# Altium PCB ROS_CAR.PcbDoc (part 11 of 13)
Units mil, origin at the board's own origin, x right, y up, seen from the top; angles counter-clockwise.
Board outline 3937.01 x 3937.01 mil, 2 copper layers (Top Layer, Bottom Layer); 201 components, 155 nets, 998 pads, 0 vias.
Unrouted connection lines stored in the file: 3.
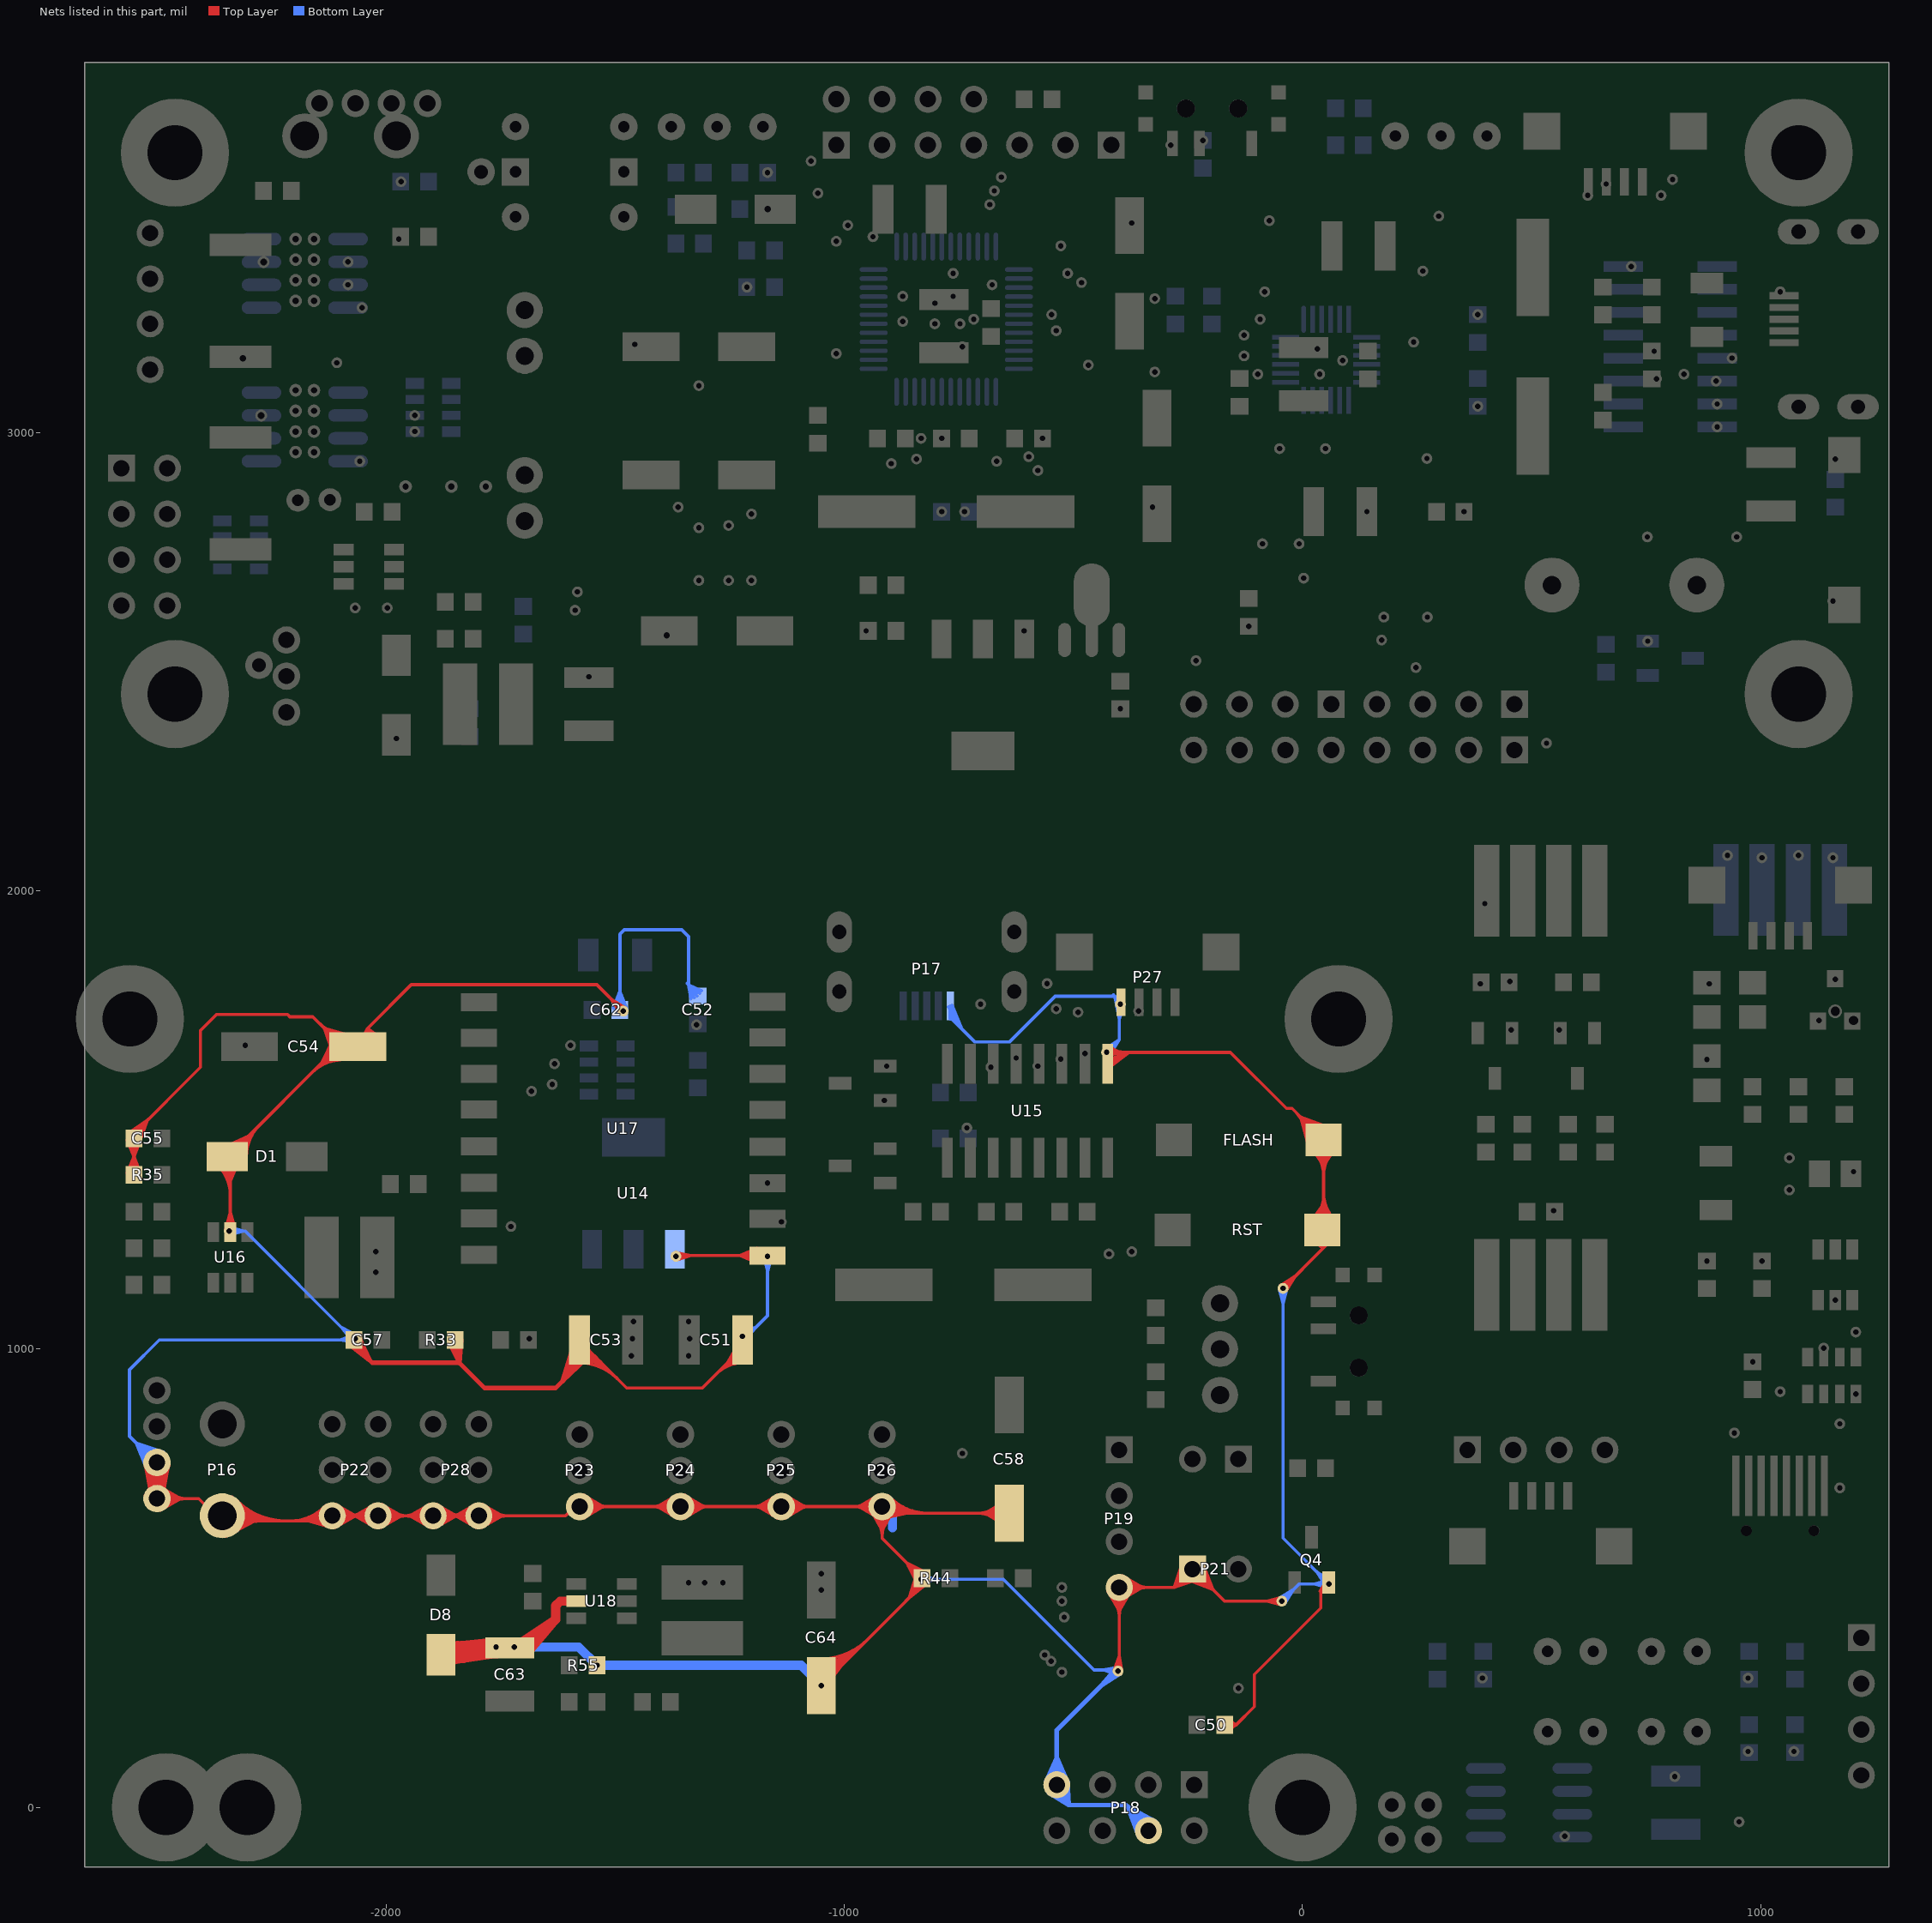
[diagram p11: the nets of this part, all layers, seen from the top]

## Nets (pads, with @x,y where several pads share a name; then routed paths per layer and width w, separated by ;. In a path a pad name is that pad's centre, name@x,y a point inside that pad or via, vN(x,y) a via of type N, cw(c..) or ccw(c..) an arc to the next point about the centre after c; other vN are vias at no path point) (continued)
SGND: C50.2 C51.1 C52.2 C53.2 C54.2 C55.1 C57.2 C58.2 C62.2 C63.2 C64.2 D1.1 D8.1 FLASH.1 P16.2 P17.1 P18.4 P18.6 P19.4 P21.1 P22.1 P22.2 P23.1 P24.1 P25.1 P26.1 P27.4 P28.1 P28.2 pad.0@-2500,673.78 pad.0@-2500,752.52 pad.1@57.5,487.5 pad.1@-42.5,1132.5 pad.1@-45,450 pad.1@-397.5,1752.5 pad.1@-402.5,297.5 pad.1@-427.5,1647.5 pad.1@-832.5,497.5 pad.1@-1050,265.67 pad.1@-1167.5,1202.5 pad.1@-1222.23,1027.77 pad.1@-1367.5,1202.5 pad.1@-1482.5,1737.5 pad.1@-1539.68,310 pad.1@-1720,350 pad.1@-1760,350 pad.1@-2067.5,1022.5 pad.1@-2342.5,1257.5 Q4.2 R33.2 R35.2 R44.2 R55.2 RST.2 U14.1 U15.1 U16.2 U17.9 U18.2 | length 60642.4
  Top Layer w7: R35.2@-2564.86,1383.77 -2550.32,1420.29 ; C55.1@-2564.86,1456.23 -2550.32,1419.71 ; R35.2@-2560.79,1391.45 ccw(c-2586.06,1416.73) -2550.32,1416.73 ccw(c-2514.57,1416.73) R35.2@-2539.84,1391.45 ; C55.1@-2560.79,1448.55 cw(c-2586.06,1423.27) -2550.32,1423.27 cw(c-2514.57,1423.27) C55.1@-2539.84,1448.55 ; C55.1@-2560.51,1471.73 -2520.99,1499.01 ; R35.2@-2558.08,1381.76 -2550.32,1420.29 ; C55.1@-2558.08,1458.24 -2550.32,1419.71 ; C55.1@-2556.09,1466.24 -2520.99,1499.01 ; R35.2@-2555.84,1386.5 ccw(c-2569.16,1399.83) -2550.32,1399.83 ccw(c-2531.47,1399.83) R35.2@-2544.79,1386.5 ; C55.1@-2555.84,1453.5 cw(c-2569.16,1440.17) -2550.32,1440.17 cw(c-2531.47,1440.17) C55.1@-2544.79,1453.5 ; R35.2@-2550.32,1380 -2550.32,1469.68 -2405,1615 -2405,1695 -2370,1730 -2215,1730 -2210,1725 -2160,1725 -2100,1665 D1.1@-2345,1420 ; R35.2@-2550.32,1380.98 -2550.32,1420.29 ; C55.1@-2550.32,1459.02 -2550.32,1419.71 ; C55.1@-2550.32,1460.98 -2520.99,1499.01 ; C55.1@-2550.32,1475.79 ccw(c-2550.32,1490.53) -2539.89,1480.11 ; C55.1@-2543.77,1456.73 -2520.99,1499.01 ; R35.2@-2542.55,1381.76 -2550.32,1420.29 ; C55.1@-2542.55,1458.24 -2550.32,1419.71 ; C55.1@-2542.51,1460.98 cw(c-2502.65,1460.98) -2530.84,1489.16 ; C55.1@-2537.34,1453.86 -2520.99,1499.01 ; R35.2@-2535.77,1383.77 -2550.32,1420.29 ; C55.1@-2535.77,1456.23 -2550.32,1419.71 ; C55.1@-2535.51,1460.98 cw(c-2478.75,1460.98) -2518.89,1501.11 ; pad.0@-2526.47,751.36 pad.0@-2510.88,697.92 ; pad.0@-2526.47,753.83 pad.0@-2516.02,697.17 ; pad.0@-2526.28,749.09 pad.0@-2506.4,699.25 ; pad.0@-2525.92,747.03 pad.0@-2502.59,700.83 ; pad.0@-2525.59,680.66 pad.0@-2500,724.78 ; pad.0@-2525.59,745.63 pad.0@-2500,701.52 ; pad.0@-2525.24,744.46 pad.0@-2497.41,700.83 ; pad.0@-2524.71,742.96 pad.0@-2493.6,699.25 ; pad.0@-2524.01,741.31 pad.0@-2489.12,697.92 ; pad.0@-2523.08,739.5 pad.0@-2483.98,697.17 ; pad.0@-2519.46,751.29 pad.0@-2506.4,699.25 ; pad.0@-2519.5,752.92 pad.0@-2510.88,697.92 ; pad.0@-2519.38,754.69 pad.0@-2516.02,697.17 ; pad.0@-2519.31,749.81 pad.0@-2502.59,700.83 ; pad.0@-2519.14,677.51 pad.0@-2500,724.78 ; pad.0@-2519.14,748.79 pad.0@-2500,701.52 ; pad.0@-2518.94,747.89 pad.0@-2497.41,700.83 ; pad.0@-2518.74,692.52 ccw(c-2563.98,737.76) -2500,737.76 ccw(c-2436.02,737.76) -2481.26,692.52 ccw(c-2436.02,737.76) -2436.02,673.78 ccw(c-2436.02,609.8) pad.0@-2481.26,655.04 ; pad.0@-2518.74,733.78 cw(c-2563.98,688.54) -2500,688.54 cw(c-2436.02,688.54) pad.0@-2481.26,733.78 ; pad.0@-2518.62,746.71 pad.0@-2493.6,699.25 ; pad.0@-2518.16,745.42 pad.0@-2489.12,697.92 ; pad.0@-2517.54,744.01 pad.0@-2483.98,697.17 ; pad.0@-2513.79,687.57 ccw(c-2547.08,720.86) -2500,720.86 ccw(c-2452.92,720.86) -2486.21,687.57 ccw(c-2452.92,720.86) -2452.92,673.78 ccw(c-2452.92,626.7) pad.0@-2486.21,659.99 ; pad.0@-2513.79,738.73 cw(c-2547.08,705.44) -2500,705.44 cw(c-2452.92,705.44) pad.0@-2486.21,738.73 ; pad.0@-2512.47,751.63 pad.0@-2502.59,700.83 ; pad.0@-2512.5,752.56 pad.0@-2506.4,699.25 ; pad.0@-2512.46,753.57 pad.0@-2510.88,697.92 ; pad.0@-2512.41,675.31 pad.0@-2500,724.78 ; pad.0@-2512.41,750.99 pad.0@-2500,701.52 ; pad.0@-2512.32,750.39 pad.0@-2497.41,700.83 ; pad.0@-2512.31,754.67 pad.0@-2516.02,697.17 ; pad.0@-2512.15,749.59 pad.0@-2493.6,699.25 ; pad.0@-2511.91,748.72 pad.0@-2489.12,697.92 ; pad.0@-2511.56,747.76 pad.0@-2483.98,697.17 ; pad.0@-2508.84,682.62 ccw(c-2530.18,703.96) -2500,703.96 ccw(c-2469.82,703.96) -2491.16,682.62 ccw(c-2469.82,703.96) -2469.82,673.78 ccw(c-2469.82,643.6) pad.0@-2491.16,664.94 ; pad.0@-2508.84,743.68 cw(c-2530.18,722.34) -2500,722.34 cw(c-2469.82,722.34) pad.0@-2491.16,743.68 ; pad.0@-2505.49,674.08 pad.0@-2500,724.78 ; pad.0@-2505.47,751.95 pad.0@-2497.41,700.83 ; pad.0@-2505.49,752.22 pad.0@-2500,701.52 ; pad.0@-2505.5,752.5 pad.0@-2502.59,700.83 ; pad.0@-2505.49,752.9 pad.0@-2506.4,699.25 ; pad.0@-2505.42,751.58 pad.0@-2493.6,699.25 ; pad.0@-2505.44,753.33 pad.0@-2510.88,697.92 ; pad.0@-2505.33,751.18 pad.0@-2489.12,697.92 ; pad.0@-2505.35,753.79 pad.0@-2516.02,697.17 ; pad.0@-2505.2,750.74 pad.0@-2483.98,697.17 ; pad.0@-2499.7,668.29 -2449,673.78 ; pad.0@-2499.7,679.27 -2449,673.78 ; pad.0@-2498.47,661.37 -2449,673.78 ; pad.0@-2498.47,686.19 -2449,673.78 ; pad.0@-2496.27,654.64 -2449,673.78 ; pad.0@-2496.27,692.92 -2449,673.78 ; pad.0@-2494.8,750.74 pad.0@-2516.02,697.17 ; pad.0@-2494.67,751.18 pad.0@-2510.88,697.92 ; pad.0@-2494.65,753.79 pad.0@-2483.98,697.17 ; pad.0@-2494.58,751.58 pad.0@-2506.4,699.25 ; pad.0@-2494.56,753.33 pad.0@-2489.12,697.92 ; pad.0@-2494.51,674.08 pad.0@-2500,724.78 ; pad.0@-2494.53,751.95 pad.0@-2502.59,700.83 ; pad.0@-2494.51,752.22 pad.0@-2500,701.52 ; pad.0@-2494.51,752.9 pad.0@-2493.6,699.25 ; pad.0@-2494.5,752.5 pad.0@-2497.41,700.83 ; pad.0@-2493.12,648.19 -2449,673.78 ; pad.0@-2493.12,699.37 -2449,673.78 ; pad.0@-2488.44,747.76 pad.0@-2516.02,697.17 ; pad.0@-2488.09,748.72 pad.0@-2510.88,697.92 ; pad.0@-2487.85,749.59 pad.0@-2506.4,699.25 ; pad.0@-2487.68,750.39 pad.0@-2502.59,700.83 ; pad.0@-2487.69,754.67 pad.0@-2483.98,697.17 ; pad.0@-2487.59,675.31 pad.0@-2500,724.78 ; pad.0@-2487.59,750.99 pad.0@-2500,701.52 ; pad.0@-2487.53,751.63 pad.0@-2497.41,700.83 ; pad.0@-2487.54,753.57 pad.0@-2489.12,697.92 ; pad.0@-2487.5,752.56 pad.0@-2493.6,699.25 ; pad.0@-2482.46,744.01 pad.0@-2516.02,697.17 ; pad.0@-2481.84,745.42 pad.0@-2510.88,697.92 ; pad.0@-2481.38,746.71 pad.0@-2506.4,699.25 ; pad.0@-2481.06,747.89 pad.0@-2502.59,700.83 ; pad.0@-2480.86,677.51 pad.0@-2500,724.78 ; pad.0@-2480.86,748.79 pad.0@-2500,701.52 ; pad.0@-2480.69,749.81 pad.0@-2497.41,700.83 ; pad.0@-2480.62,754.69 pad.0@-2483.98,697.17 ; pad.0@-2480.54,751.29 pad.0@-2493.6,699.25 ; pad.0@-2480.5,752.92 pad.0@-2489.12,697.92 ; pad.0@-2476.92,739.5 pad.0@-2516.02,697.17 ; pad.0@-2475.99,741.31 pad.0@-2510.88,697.92 ; pad.0@-2475.29,742.96 pad.0@-2506.4,699.25 ; pad.0@-2474.76,744.46 pad.0@-2502.59,700.83 ; pad.0@-2474.41,680.66 pad.0@-2500,724.78 ; pad.0@-2474.41,745.63 pad.0@-2500,701.52 ; pad.0@-2474.08,747.03 pad.0@-2497.41,700.83 ; pad.0@-2473.72,749.09 pad.0@-2493.6,699.25 ; pad.0@-2473.53,751.36 pad.0@-2489.12,697.92 ; pad.0@-2473.53,753.83 pad.0@-2483.98,697.17 ; D1.1@-2372.52,1409.38 -2340,1366.97 ; D1.1@-2366.53,1413.36 -2340,1366.97 ; D1.1@-2366.41,1400.2 cw(c-2430.17,1336.44) -2340,1336.44 ; D1.1@-2361.46,1405.15 cw(c-2413.27,1353.34) -2340,1353.34 ; D1.1@-2360.16,1416.46 -2340,1366.97 ; P16.2@-2360,625 -2408.78,673.78 pad.0@-2500,673.78 pad.0@-2500,752.52 ; P16.2@-2358.11,618.68 -2286.46,625 ; P16.2@-2357.48,625 -2128.86,625 P22.2@-2117.48,636.38 ; P16.2@-2357.14,611.67 -2286.46,625 ; D1.1@-2356.51,1410.1 cw(c-2396.37,1370.24) -2340,1370.24 ; P16.2@-2355.47,604.73 -2286.46,625 ; D1.1@-2353.48,1418.68 -2340,1366.97 ; P16.2@-2353.09,597.91 -2286.46,625 ; P16.2@-2352.55,653.39 -2286.46,625 ; D1.1@-2351.56,1415.05 cw(c-2379.47,1387.14) -2340,1387.14 ; U16.2@-2350.72,1258.76 -2341.18,1293.61 ; U16.2@-2350.68,1258.96 -2339.7,1296.72 ; D1.1@-2350.61,1441.63 -2299.35,1465.65 ; P16.2@-2349.99,591.28 -2286.46,625 ; P16.2@-2349.91,643.95 ccw(c-2304.15,689.71) -2304.15,625 ; P16.2@-2349.44,659.74 -2286.46,625 ; U16.2@-2349.21,1265.25 -2340,1297.77 ; U16.2@-2348.38,1263.38 ccw(c-2368.6,1283.6) -2340,1283.6 ; D1.1@-2347.17,1435.34 -2299.35,1465.65 ; U16.2@-2346.57,1270.55 ccw(c-2362.44,1286.42) -2340,1286.42 ccw(c-2317.56,1286.42) U16.2@-2333.43,1270.55 ; P16.2@-2345.68,665.81 -2286.46,625 ; P16.2@-2344.96,648.9 ccw(c-2287.25,706.61) -2287.25,625 ; D1.1@-2343.01,1429.61 -2299.35,1465.65 ; P16.2@-2341.29,671.54 -2286.46,625 ; P16.2@-2340.01,653.85 ccw(c-2270.35,723.51) -2270.35,625 ; U16.2@-2340,1255.12 -2340,1415 D1.1@-2345,1420 ; U16.2@-2340,1263.98 -2340,1297.77 ; U16.2@-2340,1271.53 ccw(c-2328.47,1271.53) U16.2@-2336.62,1263.38 ; -2340,1368.38 cw(c-2294.99,1368.38) D1.1@-2326.82,1400.2 ; -2340,1385.28 cw(c-2311.89,1385.28) D1.1@-2331.77,1405.15 ; D1.1@-2339.63,1420.41 -2340,1366.97 ; D1.1@-2338.21,1424.48 -2299.35,1465.65 ; P16.2@-2336.28,676.88 -2286.46,625 ; P16.2@-2335.06,613.95 cw(c-2308.39,587.29) -2308.39,625 ; P16.2@-2335.06,658.8 ccw(c-2253.45,740.41) -2253.45,625 ; U16.2@-2334.21,1258.15 -2341.18,1293.61 ; U16.2@-2334.19,1257.79 -2339.7,1296.72 ; D1.1@-2332.83,1420 -2299.35,1465.65 ; D1.1@-2332.83,1448 ccw(c-2332.83,1486.21) -2305.81,1459.19 ; D1.1@-2332.62,1419.9 -2340,1366.97 ; U16.2@-2330.79,1265.25 -2340,1297.77 ; P16.2@-2330.11,609 cw(c-2291.49,570.39) -2291.49,625 ; P16.2@-2330.11,663.75 ccw(c-2236.55,757.31) -2236.55,625 ; D1.1@-2326.95,1416.22 -2299.35,1465.65 ; D1.1@-2325.84,1420 cw(c-2279.58,1420) -2312.29,1452.71 ; D1.1@-2325.68,1418.46 -2340,1366.97 ; P16.2@-2325.16,604.05 cw(c-2274.59,553.49) -2274.59,625 ; P16.2@-2325.16,668.7 ccw(c-2219.65,774.21) -2219.65,625 ; D1.1@-2320.61,1413.18 -2299.35,1465.65 ; D1.1@-2318.9,1416.07 -2340,1366.97 ; D1.1@-2318.84,1420 cw(c-2255.68,1420) -2300.34,1464.66 ; D1.1@-2313.9,1410.94 -2299.35,1465.65 ; D1.1@-2311.84,1420 cw(c-2231.78,1420) -2288.39,1476.61 ; D1.1@-2306.87,1409.54 -2299.35,1465.65 ; D1.1@-2304.84,1420 cw(c-2207.88,1420) -2276.44,1488.56 ; -2207.79,625 ccw(c-2207.79,726.68) P22.2@-2135.88,654.78 ; -2190.89,625 ccw(c-2190.89,709.78) P22.2@-2130.93,649.83 ; -2173.99,625 ccw(c-2173.99,692.88) P22.2@-2125.99,644.88 ; -2161.7,1603.3 cw(c-2092.4,1534) C54.2@-2092.4,1632 ; -2157.09,625 ccw(c-2157.09,675.98) P22.2@-2121.04,639.93 ; -2152.85,625 cw(c-2152.85,601.01) P22.2@-2135.88,617.97 ; -2149.75,1615.25 cw(c-2092.4,1557.9) C54.2@-2092.4,1639 ; -2144.63,1709.63 ccw(c-2092.4,1761.86) C54.2@-2092.4,1688 ; -2138.36,1703.36 cw(c-2181.71,1660) -2120.4,1660 cw(c-2157.57,1660) -2131.29,1633.71 ; -2137.8,1627.2 cw(c-2092.4,1581.8) C54.2@-2092.4,1646 ; -2132.68,1697.68 ccw(c-2092.4,1737.96) C54.2@-2092.4,1681 ; P22.2@-2128.88,659.78 -2170.57,625 ; -2126.41,1691.41 cw(c-2157.81,1660) C54.2@-2113.4,1660 ; -2125.85,1639.15 cw(c-2092.4,1605.7) C54.2@-2092.4,1653 ; P22.2@-2124.67,654 -2170.57,625 ; P22.2@-2121.29,647.79 -2170.57,625 ; C54.2@-2120.73,1685.73 ccw(c-2092.4,1714.06) C54.2@-2092.4,1674 ; P22.2@-2118.76,641.24 -2170.57,625 ; P22.2@-2118.28,610.36 -2170.57,625 ; P22.2@-2117.23,631.36 -2066.95,636.38 ; P22.2@-2117.23,641.4 -2066.95,636.38 ; P22.2@-2116.81,617.36 -2170.57,625 ; P22.2@-2116.66,631.42 -2170.57,625 ; P22.2@-2116.28,624.41 -2170.57,625 ; P22.2@-2116.05,624.44 -2066.95,636.38 ; P22.2@-2116.05,648.32 -2066.95,636.38 ; C54.2@-2115.92,1644.81 -2134.74,1699.74 ; P22.2@-2113.9,617.69 -2066.95,636.38 ; P22.2@-2113.9,655.07 -2066.95,636.38 ; C54.2@-2113.83,1678.01 -2140.66,1624.34 ; P22.2@-2110.78,611.23 -2066.95,636.38 ; P22.2@-2110.78,661.53 -2066.95,636.38 ; C54.2@-2109.3,1647.54 -2134.74,1699.74 ; C54.2@-2107.64,1674.44 -2140.66,1624.34 ; P22.2@-2104.03,622.92 cw(c-2071.54,590.44) -2071.54,636.38 cw(c-2071.54,682.31) P22.2@-2104.03,649.83 ; C54.2@-2103.14,1651.02 -2134.74,1699.74 ; C54.2@-2101.98,1670.21 -2140.66,1624.34 ; P22.2@-2099.08,617.97 cw(c-2054.64,573.54) -2054.64,636.38 cw(c-2054.64,699.21) P22.2@-2099.08,654.78 ; C54.2@-2097.49,1655.2 -2134.74,1699.74 ; C54.2@-2096.88,1665.37 -2140.66,1624.34 ; C54.2@-2088.58,1654.14 -2140.66,1624.34 ; C54.2@-2087.93,1665.38 -2134.74,1699.74 ; C54.2@-2085.45,1647.85 -2140.66,1624.34 ; C54.2@-2084.12,1671.28 -2134.74,1699.74 ; C54.2@-2083.07,1641.19 -2140.66,1624.34 ; C54.2@-2081.47,1634.22 -2140.66,1624.34 ; C54.2@-2081.04,1677.65 -2134.74,1699.74 ; C54.2@-2078.73,1684.43 -2134.74,1699.74 ; C54.2@-2059.11,1663.82 -2040,1700 ; C54.2@-2052.35,1660.99 -2040,1700 ; C54.2@-2048.73,1681.97 ccw(c-2062.98,1700) -2040,1700 ; C54.2@-2045.36,1659.43 -2040,1700 ; C54.2@-2040,1670 -2040,1700 ; -2040,1692.35 ccw(c-2028.52,1692.35) C54.2@-2029.53,1680.91 ; C54.2@-2038.32,1659.12 -2040,1700 ; P22.1@-2035.88,617.97 ccw(c-2080.32,573.54) -2080.32,636.38 ccw(c-2080.32,699.21) P22.1@-2035.88,654.78 ; C54.2@-2031.38,1660 -2040,1700 ; P22.1@-2030.93,622.92 ccw(c-2063.42,590.44) -2063.42,636.38 ccw(c-2063.42,682.31) P22.1@-2030.93,649.83 ; C54.2@-2028.91,1687.89 cw(c-2027.84,1700) -2040,1700 ; C54.2@-2024.69,1662.05 -2040,1700 ; P22.1@-2024.18,611.23 -2068.01,636.38 ; P22.1@-2024.18,661.53 -2068.01,636.38 ; P22.1@-2021.06,617.69 -2068.01,636.38 ; P22.1@-2021.06,655.07 -2068.01,636.38 ; P22.1@-2018.91,624.44 -2068.01,636.38 ; P22.1@-2018.91,648.32 -2068.01,636.38 ; C54.2@-2018.4,1665.25 -2040,1700 ; P22.1@-2017.73,631.36 -2068.01,636.38 ; P22.1@-2017.73,641.4 -2068.01,636.38 ; P22.1@-2017.23,631.36 -1966.95,636.38 ; P22.1@-2017.23,641.4 -1966.95,636.38 ; P22.1@-2016.05,624.44 -1966.95,636.38 ; P22.1@-2016.05,648.32 -1966.95,636.38 ; P22.1@-2013.9,617.69 -1966.95,636.38 ; P22.1@-2013.9,655.07 -1966.95,636.38 ; C54.2@-2012.68,1669.54 -2040,1700 ; P22.1@-2010.78,611.23 -1966.95,636.38 ; P22.1@-2010.78,661.53 -1966.95,636.38 ; C54.2@-2007.68,1674.91 -2040,1700 ; P22.1@-2004.03,622.92 cw(c-1971.54,590.44) -1971.54,636.38 cw(c-1971.54,682.31) P22.1@-2004.03,649.83 ; P22.1@-1999.08,617.97 cw(c-1954.64,573.54) -1954.64,636.38 cw(c-1954.64,699.21) P22.1@-1999.08,654.78 ; P28.2@-1915.88,617.97 ccw(c-1960.32,573.54) -1960.32,636.38 ccw(c-1960.32,699.21) P28.2@-1915.88,654.78 ; P28.2@-1910.93,622.92 ccw(c-1943.42,590.44) -1943.42,636.38 ccw(c-1943.42,682.31) P28.2@-1910.93,649.83 ; P28.2@-1904.18,611.23 -1948.01,636.38 ; P28.2@-1904.18,661.53 -1948.01,636.38 ; P28.2@-1901.06,617.69 -1948.01,636.38 ; P28.2@-1901.06,655.07 -1948.01,636.38 ; P28.2@-1898.91,624.44 -1948.01,636.38 ; P28.2@-1898.91,648.32 -1948.01,636.38 ; P28.2@-1897.73,631.36 -1948.01,636.38 ; P28.2@-1897.73,641.4 -1948.01,636.38 ; P28.2@-1897.23,631.36 -1846.95,636.38 ; P28.2@-1897.23,641.4 -1846.95,636.38 ; P28.2@-1896.05,624.44 -1846.95,636.38 ; P28.2@-1896.05,648.32 -1846.95,636.38 ; P28.2@-1893.9,617.69 -1846.95,636.38 ; P28.2@-1893.9,655.07 -1846.95,636.38 ; P28.2@-1890.78,611.23 -1846.95,636.38 ; P28.2@-1890.78,661.53 -1846.95,636.38 ; P28.2@-1884.03,622.92 cw(c-1851.54,590.44) -1851.54,636.38 cw(c-1851.54,682.31) P28.2@-1884.03,649.83 ; P28.2@-1879.08,617.97 cw(c-1834.64,573.54) -1834.64,636.38 cw(c-1834.64,699.21) P28.2@-1879.08,654.78 ; P28.1@-1815.88,617.97 ccw(c-1860.32,573.54) -1860.32,636.38 ccw(c-1860.32,699.21) P28.1@-1815.88,654.78 ; P28.1@-1810.93,622.92 ccw(c-1843.42,590.44) -1843.42,636.38 ccw(c-1843.42,682.31) P28.1@-1810.93,649.83 ; P28.1@-1804.18,611.23 -1848.01,636.38 ; P28.1@-1804.18,661.53 -1848.01,636.38 ; P28.1@-1801.06,617.69 -1848.01,636.38 ; P28.1@-1801.06,655.07 -1848.01,636.38 ; P28.1@-1798.91,624.44 -1848.01,636.38 ; P28.1@-1798.91,648.32 -1848.01,636.38 ; P28.1@-1797.73,631.36 -1848.01,636.38 ; P28.1@-1797.73,641.4 -1848.01,636.38 ; P28.1@-1797.23,631.36 -1746.95,636.38 ; P28.1@-1797.23,641.4 -1746.95,636.38 ; P28.1@-1796.05,624.44 -1746.95,636.38 ; P28.1@-1796.05,648.32 -1746.95,636.38 ; P28.1@-1793.9,617.69 -1746.95,636.38 ; P28.1@-1793.9,655.07 -1746.95,636.38 ; P28.1@-1790.78,611.23 -1746.95,636.38 ; P28.1@-1790.78,661.53 -1746.95,636.38 ; P28.1@-1784.03,622.92 cw(c-1751.54,590.44) -1751.54,636.38 cw(c-1751.54,682.31) P28.1@-1784.03,649.83 ; P28.1@-1779.08,617.97 cw(c-1734.64,573.54) -1734.64,636.38 cw(c-1734.64,699.21) P28.1@-1779.08,654.78 ; C53.2@-1578.85,984.01 -1541.11,981.11 ; C53.2@-1578.74,976.97 -1541.11,981.11 ; C53.2@-1578.07,969.96 cw(c-1578.07,853.8) -1495.93,935.93 ; C53.2@-1578.07,976.96 cw(c-1578.07,877.7) -1507.88,947.88 ; C53.2@-1578.07,983.96 cw(c-1578.07,901.6) -1519.83,959.83 ; C53.2@-1578.07,989.29 -1541.11,981.11 ; C53.2@-1578.07,990.96 cw(c-1578.07,925.5) -1531.78,971.78 ; C53.2@-1578.07,997.96 cw(c-1578.07,949.4) -1543.73,983.73 ; C53.2@-1578.07,1004.96 cw(c-1578.07,973.3) C53.2@-1555.68,995.68 ; P23.1@-1577.48,656.38 -1526.48,656.38 ; C53.2@-1577.29,969.97 -1541.11,981.11 ; P23.1@-1577.18,650.89 -1526.48,656.38 ; P23.1@-1577.18,661.87 -1526.48,656.38 ; C53.2@-1576.55,994.41 -1541.11,981.11 ; P23.1@-1575.95,643.97 -1526.48,656.38 ; P23.1@-1575.95,668.78 -1526.48,656.38 ; P23.1@-1573.75,637.24 -1526.48,656.38 ; P23.1@-1573.75,675.52 -1526.48,656.38 ; C53.2@-1573.48,1000.74 -1541.11,981.11 ; P23.1@-1570.6,630.79 -1526.48,656.38 ; P23.1@-1570.6,681.97 -1526.48,656.38 ; C53.2@-1569.21,1006.48 -1541.11,981.11 ; P23.1@-1568.64,647.54 cw(c-1547.3,626.2) -1547.3,656.38 cw(c-1547.3,686.56) P23.1@-1568.64,665.22 ; C53.2@-1565,1005 -1475,915 -1310,915 C51.1@-1220,1005 ; P23.1@-1563.69,642.59 cw(c-1530.4,609.3) -1530.4,656.38 cw(c-1530.4,703.46) P23.1@-1563.69,670.17 ; P23.1@-1558.74,637.64 cw(c-1513.5,592.4) -1513.5,656.38 cw(c-1513.5,720.35) P23.1@-1558.74,675.12 ; pad.1@-1490.81,1737.5 ccw(c-1510.88,1737.5) -1496.69,1751.69 ccw(c-1482.5,1765.88) pad.1@-1482.5,1745.81 ; pad.1@-1488.99,1732.31 -1509.16,1764.16 pad.1@-1477.31,1743.99 ; pad.1@-1482.5,1737.5 -1540,1795 -1945,1795 -2040,1700 ; P24.1@-1376.22,637.64 ccw(c-1421.46,592.4) -1421.46,656.38 ccw(c-1421.46,720.35) P24.1@-1376.22,675.12 ; pad.1@-1374.02,1204.02 U17.9@-1167.56,1204.02 ; P24.1@-1371.27,642.59 ccw(c-1404.56,609.3) -1404.56,656.38 ccw(c-1404.56,703.46) P24.1@-1371.27,670.17 ; pad.1@-1367.5,1202.5 -1334.63,1204.02 ; pad.1@-1366.83,1210.78 -1334.63,1204.02 ; P24.1@-1366.32,647.54 ccw(c-1387.66,626.2) -1387.66,656.38 ccw(c-1387.66,686.56) P24.1@-1366.32,665.22 ; pad.1@-1366.07,1194.31 -1334.63,1204.02 ; P24.1@-1364.37,630.79 -1408.48,656.38 ; P24.1@-1364.37,681.97 -1408.48,656.38 ; pad.1@-1361.62,1196.62 cw(c-1343.78,1178.78) -1343.78,1204.02 ; pad.1@-1361.62,1208.38 ccw(c-1351.1,1218.9) -1351.1,1204.02 ; P24.1@-1361.21,637.24 -1408.48,656.38 ; P24.1@-1361.21,675.52 -1408.48,656.38 ; P24.1@-1359.01,643.97 -1408.48,656.38 ; P24.1@-1359.01,668.78 -1408.48,656.38 ; P24.1@-1357.78,650.89 -1408.48,656.38 ; P24.1@-1357.78,661.87 -1408.48,656.38 ; P24.1@-1357.18,650.89 -1306.48,656.38 ; P24.1@-1357.18,661.87 -1306.48,656.38 ; P24.1@-1355.95,643.97 -1306.48,656.38 ; P24.1@-1355.95,668.78 -1306.48,656.38 ; P24.1@-1353.75,637.24 -1306.48,656.38 ; P24.1@-1353.75,675.52 -1306.48,656.38 ; P24.1@-1350.6,630.79 -1306.48,656.38 ; P24.1@-1350.6,681.97 -1306.48,656.38 ; P24.1@-1348.64,647.54 cw(c-1327.3,626.2) -1327.3,656.38 cw(c-1327.3,686.56) P24.1@-1348.64,665.22 ; P24.1@-1343.69,642.59 cw(c-1310.4,609.3) -1310.4,656.38 cw(c-1310.4,703.46) P24.1@-1343.69,670.17 ; P24.1@-1338.74,637.64 cw(c-1293.5,592.4) -1293.5,656.38 cw(c-1293.5,720.35) P24.1@-1338.74,675.12 ; -1278.46,946.54 cw(c-1221.93,890.01) C51.1@-1221.93,969.96 ; -1266.51,958.49 cw(c-1221.93,913.91) C51.1@-1221.93,976.96 ; -1254.56,970.44 cw(c-1221.93,937.81) C51.1@-1221.93,983.96 ; -1245.19,979.81 ccw(c-1254.67,989.29) C51.1@-1241.26,989.29 ; C51.1@-1235.57,1002.99 -1254.38,970.62 ; C51.1@-1229.76,998.82 -1254.38,970.62 ; C51.1@-1224.91,993.71 -1254.38,970.62 ; C51.1@-1221.93,989.29 -1254.38,970.62 ; C51.1@-1219.61,984.49 -1254.38,970.62 ; C51.1@-1217.62,977.73 -1254.38,970.62 ; C51.1@-1216.94,970.61 -1254.38,970.62 ; U17.9@-1198.69,1192.57 ccw(c-1226.32,1164.94) -1226.32,1204.02 ccw(c-1226.32,1243.09) U17.9@-1198.69,1215.46 ; U17.9@-1193.74,1197.52 ccw(c-1209.42,1181.84) -1209.42,1204.02 ccw(c-1209.42,1226.19) U17.9@-1193.74,1210.51 ; U17.9@-1191.22,1204.02 cw(c-1191.22,1178.78) U17.9@-1173.38,1196.62 ; U17.9@-1190.46,1188.15 -1227.93,1204.02 ; U17.9@-1190.46,1219.88 -1227.93,1204.02 ; U17.9@-1188.28,1194.89 -1227.93,1204.02 ; U17.9@-1188.28,1213.14 -1227.93,1204.02 ; U17.9@-1187.24,1204.02 -1227.93,1204.02 ; U17.9@-1183.9,1204.02 ccw(c-1183.9,1218.9) U17.9@-1173.38,1208.38 ; U17.9@-1168.93,1194.31 U17.9@-1200.4,1204.02 ; U17.9@-1168.17,1210.78 U17.9@-1200.4,1204.02 ; pad.1@-1167.5,1202.5 U17.9@-1200.4,1204.02 ; P25.1@-1156.22,637.64 ccw(c-1201.46,592.4) -1201.46,656.38 ccw(c-1201.46,720.35) P25.1@-1156.22,675.12 ; P25.1@-1151.27,642.59 ccw(c-1184.56,609.3) -1184.56,656.38 ccw(c-1184.56,703.46) P25.1@-1151.27,670.17 ; P25.1@-1146.32,647.54 ccw(c-1167.66,626.2) -1167.66,656.38 ccw(c-1167.66,686.56) P25.1@-1146.32,665.22 ; P25.1@-1144.37,630.79 -1188.48,656.38 ; P25.1@-1144.37,681.97 -1188.48,656.38 ; P25.1@-1141.21,637.24 -1188.48,656.38 ; P25.1@-1141.21,675.52 -1188.48,656.38 ; P25.1@-1139.01,643.97 -1188.48,656.38 ; P25.1@-1139.01,668.78 -1188.48,656.38 ; P25.1@-1137.78,650.89 -1188.48,656.38 ; P25.1@-1137.78,661.87 -1188.48,656.38 ; P25.1@-1137.18,650.89 -1086.48,656.38 ; P25.1@-1137.18,661.87 -1086.48,656.38 ; P25.1@-1135.95,643.97 -1086.48,656.38 ; P25.1@-1135.95,668.78 -1086.48,656.38 ; P25.1@-1133.75,637.24 -1086.48,656.38 ; P25.1@-1133.75,675.52 -1086.48,656.38 ; P25.1@-1130.6,630.79 -1086.48,656.38 ; P25.1@-1130.6,681.97 -1086.48,656.38 ; P25.1@-1128.64,647.54 cw(c-1107.3,626.2) -1107.3,656.38 cw(c-1107.3,686.56) P25.1@-1128.64,665.22 ; P25.1@-1123.69,642.59 cw(c-1090.4,609.3) -1090.4,656.38 cw(c-1090.4,703.46) P25.1@-1123.69,670.17 ; P25.1@-1118.74,637.64 cw(c-1073.5,592.4) -1073.5,656.38 cw(c-1073.5,720.35) P25.1@-1118.74,675.12 ; C64.2@-1055.19,272.16 -1023.34,292.33 C64.2@-1043.51,260.48 ; C64.2@-1052.59,309.94 -1003.65,312.01 ; C64.2@-1052.37,317.04 -1003.65,312.01 ; C64.2@-1051.78,302.95 -1003.65,312.01 ; C64.2@-1051.1,324.16 -1003.65,312.01 ; C64.2@-1050,265.67 R44.2@-830.32,485.35 ; C64.2@-1050,273.98 ccw(c-1050,294.04) -1035.81,279.86 ccw(c-1021.62,265.67) C64.2@-1041.69,265.67 ; C64.2@-1050,289.18 ccw(c-1050,345.93) -1009.87,305.8 ; C64.2@-1050,303.18 ccw(c-1050,393.73) -985.97,329.7 ; C64.2@-1050,310.18 ccw(c-1050,417.63) -974.02,341.65 ; C64.2@-1050,317.18 ccw(c-1050,441.53) -962.07,353.6 ; C64.2@-1050,324.18 ccw(c-1050,465.43) -950.12,365.55 ; C64.2@-1047.27,289.74 -1003.65,312.01 ; C64.2@-1043.63,283.72 -1003.65,312.01 ; C64.2@-1039.11,278.23 -1003.65,312.01 ; C64.2@-1033.75,273.38 -1003.65,312.01 ; -997.92,317.75 cw(c-1050,369.83) -1050,296.18 -1003.65,312.01 ; P26.1@-943.07,649.49 -917.48,605.38 ; P26.1@-936.62,652.65 -917.48,605.38 ; P26.1@-936.22,675.12 cw(c-981.46,720.35) -981.46,656.38 cw(c-981.46,592.4) -936.22,637.64 cw(c-981.46,592.4) -917.48,592.4 cw(c-853.5,592.4) -898.74,637.64 cw(c-888.48,627.38) -888.48,641.89 ; P26.1@-931.27,670.17 cw(c-964.56,703.46) -964.56,656.38 cw(c-964.56,609.3) -931.27,642.59 cw(c-964.56,609.3) -917.48,609.3 cw(c-870.4,609.3) P26.1@-903.69,642.59 ; P26.1@-929.89,654.85 -917.48,605.38 ; P26.1@-926.32,665.22 cw(c-947.66,686.56) -947.66,656.38 cw(c-947.66,626.2) -926.32,647.54 cw(c-947.66,626.2) -917.48,626.2 cw(c-887.3,626.2) P26.1@-908.64,647.54 ; P26.1@-924.37,630.79 -968.48,656.38 ; P26.1@-924.37,681.97 -968.48,656.38 ; P26.1@-922.97,656.08 -917.48,605.38 ; P26.1@-921.21,637.24 -968.48,656.38 ; P26.1@-921.21,675.52 -968.48,656.38 ; P26.1@-919.33,644.02 -862.95,641.89 ; P26.1@-919.16,636.95 -862.95,641.89 ; P26.1@-919.01,643.97 -968.48,656.38 ; P26.1@-919.01,668.78 -968.48,656.38 ; P26.1@-918.63,651 -862.95,641.89 ; P26.1@-918.54,655.32 ccw(c-886.12,687.73) -886.12,641.89 ; P26.1@-918.08,629.88 -862.95,641.89 ; P26.1@-917.78,650.89 -968.48,656.38 ; P26.1@-917.78,661.87 -968.48,656.38 ; P26.1@-917.48,650 -909.37,641.89 C58.2@-640,641.89 ; P26.1@-915.81,661.62 -862.95,641.89 ; P26.1@-913.59,660.27 ccw(c-869.22,704.63) -869.22,641.89 ; P26.1@-912.95,668.03 -862.95,641.89 ; P26.1@-911.99,656.08 -917.48,605.38 ; P26.1@-909.29,674.08 -862.95,641.89 ; P26.1@-908.64,665.22 ccw(c-852.33,721.53) -852.33,641.89 ; P26.1@-905.07,654.85 -917.48,605.38 ; P26.1@-904.85,679.68 -862.95,641.89 ; P26.1@-903.69,670.17 ccw(c-835.43,738.43) -835.43,641.89 ; P26.1@-898.74,675.12 ccw(c-818.53,755.33) -818.53,641.89 ; P26.1@-898.34,652.65 -917.48,605.38 ; P26.1@-891.89,649.49 -917.48,605.38 ; -865.25,450.42 ccw(c-913.85,499.02) R44.2@-845.12,499.02 ; -857.27,526.96 ccw(c-830.32,553.91) R44.2@-830.32,515.79 ; -856.82,458.85 ccw(c-895.47,497.5) -840.81,497.5 ccw(c-872.19,497.5) -850,519.69 ; -854.9,524.58 cw(c-878.49,500.98) R44.2@-845.12,500.98 ; -853.3,462.37 ccw(c-889.95,499.02) R44.2@-838.12,499.02 ; R44.2@-845.32,515.01 ccw(c-830.32,530.02) R44.2@-830.32,508.79 ; -844.87,470.8 ccw(c-871.57,497.5) R44.2@-833.81,497.5 ; R44.2@-843.69,505.38 -858.37,457.3 ; R44.2@-842.2,492.15 -863.47,533.16 ; -841.35,474.32 ccw(c-866.05,499.02) R44.2@-831.12,499.02 ; R44.2@-840.04,501 -853.5,462.17 ; R44.2@-840,501.08 -851.26,467.87 ; R44.2@-839.79,501.49 -853.36,468.03 ; R44.2@-839.67,501.7 -855.66,466.15 ; R44.2@-839.53,493.07 -857.15,528.82 ; R44.2@-839.42,492.9 -856.69,526.38 ; R44.2@-839.46,492.95 -856.13,526.03 ; R44.2@-839.24,492.63 -857.43,524.89 ; R44.2@-839.08,492.42 -859.78,526.03 ; R44.2@-838.69,508.38 ccw(c-832.5,514.57) R44.2@-832.5,505.81 ; R44.2@-837.11,502.86 -858.37,457.3 ; R44.2@-836.21,495.86 -863.47,533.16 ; R44.2@-834.99,489.57 R44.2@-819.38,489.03 ; R44.2@-833.83,489.3 cw(c-834.51,485.16) -830.32,485.16 cw(c-823.13,485.16) R44.2@-827.48,490.88 ; R44.2@-832.92,482.75 ccw(c-847.67,497.5) R44.2@-826.81,497.5 ; R44.2@-830.32,499.02 -858.37,457.3 ; R44.2@-830.32,500.98 -863.47,533.16 ; R44.2@-827.13,503.84 -859.78,526.03 ; R44.2@-827.02,503.75 -857.43,524.89 ; R44.2@-826.76,503.51 -856.69,526.38 ; R44.2@-826.73,503.49 -856.13,526.03 ; R44.2@-826.54,503.29 -857.15,528.82 ; R44.2@-826.38,491.88 -855.66,466.15 ; R44.2@-826.31,491.95 -853.36,468.03 ; R44.2@-826.3,503.03 R44.2@-819.38,489.03 ; R44.2@-826.05,492.25 -851.26,467.87 ; R44.2@-825.82,492.55 -853.5,462.17 ; R44.2@-825.79,492.59 -850.72,465.55 ; R44.2@-825.7,492.72 -852.14,462.37 ; R44.2@-825.37,507.03 -863.47,533.16 ; R44.2@-824.19,494.17 -858.37,457.3 ; R44.2@-821.84,513.13 -863.47,533.16 ; C58.2@-659.8,622.09 ccw(c-707.59,574.3) -707.59,641.89 ccw(c-707.59,709.48) C58.2@-659.8,661.69 ; C58.2@-654.85,627.04 ccw(c-690.69,591.2) -690.69,641.89 ccw(c-690.69,692.58) C58.2@-654.85,656.74 ; C58.2@-649.9,631.99 ccw(c-673.79,608.1) -673.79,641.89 ccw(c-673.79,675.68) C58.2@-649.9,651.79 ; C58.2@-647.47,614.91 -692.5,641.89 ; C58.2@-647.47,668.87 -692.5,641.89 ; C58.2@-644.2,621.32 -692.5,641.89 ; C58.2@-644.2,662.46 -692.5,641.89 ; C58.2@-641.87,628.02 -692.5,641.89 ; C58.2@-641.87,655.76 -692.5,641.89 ; C58.2@-640.47,634.91 -692.5,641.89 ; C58.2@-640.47,648.87 -692.5,641.89 ; U15.1@-428.37,1629.96 -378.53,1647.5 ; pad.1@-427.5,1647.5 -157.5,1647.5 -35,1525 -22.72,1525 FLASH.1@45.91,1456.38 RST.2@45.91,1249.09 ; U15.1@-426.45,1639.26 -394.69,1647.5 U15.1@-426.45,1655.74 ; P19.4@-425.15,473.3 -400,429.47 ; U15.1@-425,1622.36 -378.53,1647.5 ; U15.1@-424.07,1654.79 ccw(c-406.49,1672.37) -406.49,1647.5 ; U15.1@-421.62,1641.62 cw(c-407.44,1627.44) -407.44,1647.5 cw(c-407.44,1667.56) U15.1@-421.62,1653.38 ; U15.1@-420.48,1615.39 -378.53,1647.5 ; U15.1@-419.12,1659.73 ccw(c-389.59,1689.27) -389.59,1647.5 ; P19.4@-418.69,476.42 -400,429.47 ; P19.4@-418.4,461.6 cw(c-462.84,417.16) -400,417.16 cw(c-337.16,417.16) -381.6,461.6 cw(c-337.16,417.16) -337.16,480 cw(c-337.16,542.84) P19.4@-381.6,498.4 ; P19.4@-413.45,466.55 cw(c-445.94,434.06) -400,434.06 cw(c-354.06,434.06) -386.55,466.55 cw(c-354.06,434.06) -354.06,480 cw(c-354.06,525.94) P19.4@-386.55,493.45 ; P19.4@-411.94,478.57 -400,429.47 ; pad.1@-410.64,299.16 -400,330.6 ; pad.1@-408.38,303.38 ccw(c-428.6,323.6) -400,323.6 ; P19.4@-405.02,479.75 -400,429.47 ; -400,311.53 ccw(c-388.47,311.53) pad.1@-396.62,303.38 ; P19.4@-399.75,474.98 -349.47,480 ; P19.4@-399.75,485.02 -349.47,480 ; P19.4@-398.57,468.06 -349.47,480 ; P19.4@-398.57,491.94 -349.47,480 ; P19.4@-396.42,461.31 -349.47,480 ; P19.4@-396.42,498.69 -349.47,480 ; P19.4@-394.98,479.75 -400,429.47 ; pad.1@-394.2,297.92 -400,330.6 ; P19.4@-393.3,454.85 -349.47,480 ; P19.4@-393.3,505.15 -349.47,480 ; P19.4@-388.06,478.57 -400,429.47 ; P19.4@-381.31,476.42 -400,429.47 ; P19.4@-374.85,473.3 -400,429.47 ; P21.1@-265.95,518 cw(c-314.26,514.26) -280,480 ; P21.1@-262.14,533.68 -280,480 ; P21.1@-258.97,518.53 cw(c-294.29,515.81) -269.24,490.76 cw(c-244.19,465.71) P21.1@-241.47,501.03 ; P21.1@-255.53,531 -280,480 ; P21.1@-254.19,498.18 -195.62,475.62 ; P21.1@-251.26,504.66 -195.62,475.62 ; P21.1@-249.36,527.55 -280,480 ; P21.1@-247.65,510.72 -195.62,475.62 ; P21.1@-243.71,523.39 -280,480 ; P21.1@-243.41,516.31 -195.62,475.62 ; P21.1@-242,494.05 ccw(c-245.74,445.74) -280,480 ; P21.1@-240,493.97 cw(c-240,431.14) -195.57,475.57 cw(c-151.14,520) P21.1@-213.97,520 ; P21.1@-240,500.97 cw(c-240,455.04) -207.52,487.52 cw(c-175.04,520) P21.1@-220.97,520 ; P21.1@-236.61,516.29 -280,480 ; P21.1@-236.31,523.41 -195.62,475.62 ; P21.1@-232.45,510.64 -280,480 ; P21.1@-230.72,527.65 -195.62,475.62 ; P21.1@-229,504.47 -280,480 ; P21.1@-226.32,497.86 -280,480 ; P21.1@-224.66,531.26 -195.62,475.62 ; P21.1@-218.18,534.19 -195.62,475.62 ; C50.2@-169.69,180 -145,180 ; C50.2@-168.45,172.29 -145,180 ; C50.2@-168.45,187.71 -145,180 ; C50.2@-165.24,165.87 -145,180 ; C50.2@-165.24,194.13 -145,180 ; C50.2@-156.62,173.03 cw(c-145,166.83) -145,180 ; C50.2@-156.62,186.97 ccw(c-145,193.17) -145,180 ; pad.1@-50.88,444.12 ccw(c-65.06,429.94) -65.06,450 ccw(c-65.06,470.06) pad.1@-50.88,455.88 ; pad.1@-47.69,1138.99 -15.84,1159.16 ; pad.1@-46.05,441.76 -77.81,450 ; pad.1@-46.05,458.24 -77.81,450 ; pad.1@-45,1130 45,1220 ; pad.1@-42.5,1132.5 -15.84,1159.16 ; pad.1@-42.5,1140.81 ccw(c-42.5,1160.88) -28.31,1146.69 ccw(c-14.12,1132.5) pad.1@-34.19,1132.5 ; pad.1@-36.01,1127.31 -15.84,1159.16 ; -15.33,1517.61 cw(c-76.56,1456.38) FLASH.1@10.04,1456.38 ; -5.82,1508.11 ccw(c41.97,1555.9) FLASH.1@41.97,1488.31 ; -3.38,1505.66 cw(c-52.66,1456.38) FLASH.1@17.04,1456.38 ; 6.13,1496.16 ccw(c41.97,1532) FLASH.1@41.97,1481.31 ; 8.57,1493.71 cw(c-28.76,1456.38) FLASH.1@24.04,1456.38 ; RST.2@13.19,1270.37 45.91,1316.48 ; FLASH.1@14.08,1440.82 -4.38,1506.66 ; RST.2@14.64,1246.09 45,1220 ; FLASH.1@15.28,1447.34 45.91,1399.95 ; FLASH.1@18.08,1484.21 ccw(c41.97,1508.1) FLASH.1@41.97,1474.31 ; RST.2@19.34,1266.58 45.91,1316.48 ; RST.2@20.02,1251.29 45,1220 ; FLASH.1@20.86,1443.11 -4.38,1506.66 ; FLASH.1@21.59,1450.87 45.91,1399.95 ; FLASH.1@23.33,1433.8 cw(c-31.19,1379.28) 45.91,1379.28 cw(c123,1379.28) FLASH.1@68.49,1433.8 ; RST.2@24.74,1282.58 ccw(c-26.35,1333.67) 45.91,1333.67 ; RST.2@25.82,1263.63 45.91,1316.48 ; RST.2@26.08,1255.28 45,1220 ; FLASH.1@27.3,1446.06 -4.38,1506.66 ; FLASH.1@28.2,1453.53 45.91,1399.95 ; FLASH.1@28.28,1438.75 cw(c-14.29,1396.18) 45.91,1396.18 cw(c106.1,1396.18) FLASH.1@63.54,1438.75 ; RST.2@29.69,1277.63 ccw(c-9.45,1316.77) 45.91,1316.77 ; RST.2@32.56,1261.54 45.91,1316.48 ; RST.2@32.62,1258.07 45,1220 ; FLASH.1@33.22,1443.7 cw(c2.61,1413.08) 45.91,1413.08 cw(c89.2,1413.08) FLASH.1@58.59,1443.7 ; FLASH.1@33.36,1449.63 -4.38,1506.66 ; RST.2@34.64,1272.68 ccw(c7.45,1299.87) 45.91,1299.87 ; FLASH.1@35.02,1455.32 45.91,1399.95 ; RST.2@37.8,1228.56 cw(c36.28,1219.97) 45,1219.97 ; 38.31,471.69 cw(c56.44,453.56) Q4.2@57.24,479.19 ; FLASH.1@39,1453.8 -4.38,1506.66 ; RST.2@39.47,1259.65 45,1220 ; RST.2@39.47,1260.31 45.91,1316.48 ; FLASH.1@41.97,1456.24 45.91,1399.95 ; FLASH.1@44.78,1459.13 -4.38,1506.66 ; RST.2@45,1255 45,1220 ; Q4.2@45.71,479.09 ccw(c37.3,487.5) Q4.2@49.19,487.5 ; 45.91,1306.72 ccw(c94.04,1306.72) RST.2@60,1272.68 ; 45.91,1323.62 ccw(c110.94,1323.62) RST.2@64.95,1277.63 ; 45.91,1340.51 ccw(c127.84,1340.51) RST.2@69.9,1282.58 ; FLASH.1@49.39,1464.41 -4.38,1506.66 ; FLASH.1@49.84,1456.24 45.91,1399.95 ; RST.2@52.04,1229.26 ccw(c54.65,1219.97) 45,1219.97 ; FLASH.1@53.45,1470.16 -4.38,1506.66 ; RST.2@54.27,1258.95 45,1220 ; RST.2@54.3,1260.57 45.91,1316.48 ; FLASH.1@56.79,1455.32 45.91,1399.95 ; FLASH.1@56.91,1476.33 -4.38,1506.66 ; Q4.2@57.4,490.79 40,473.39 ; FLASH.1@59.75,1482.9 -4.38,1506.66 ; RST.2@61.01,1256.69 45,1220 ; RST.2@61.2,1262.05 45.91,1316.48 ; FLASH.1@63.61,1453.53 45.91,1399.95 ; RST.2@67.37,1253.2 45,1220 ; RST.2@67.93,1264.41 45.91,1316.48 ; FLASH.1@70.22,1450.87 45.91,1399.95 ; RST.2@73.16,1248.45 45,1220 ; RST.2@74.39,1267.64 45.91,1316.48 ; FLASH.1@76.53,1447.34 45.91,1399.95 ; pad.0@-2516.02,697.17 pad.0@-2500,752.52 ; pad.0@-2510.88,697.92 pad.0@-2500,752.52 ; pad.0@-2506.4,699.25 pad.0@-2500,752.52 ; pad.0@-2502.59,700.83 pad.0@-2500,752.52 ; pad.0@-2500,701.52 pad.0@-2500,752.52 ; pad.0@-2500,752.52 pad.0@-2483.98,697.17 ; pad.0@-2500,752.52 pad.0@-2493.6,699.25 ; pad.0@-2500,752.52 pad.0@-2489.12,697.92 ; pad.0@-2500,752.52 pad.0@-2497.41,700.83 ; D1.1@-2345,1420 D1.1@-2346.61,1420 -2340,1366.97 ; pad.1@-2342.5,1257.5 -2340,1290.5 ; pad.1@-2342.5,1257.5 -2339.7,1296.72 ; pad.1@-2342.5,1257.5 -2340,1290.6 ; pad.1@-2342.5,1257.5 -2341.18,1293.61 ; -2340,1290.5 -2334.2,1257.92 -2340,1290.6 ; -2340,1290.5 -2350.64,1259.16 -2340,1290.6 ; -2170.57,625 P22.2@-2117.48,636.38 ; -2140.66,1624.34 -2092.4,1660 -2134.74,1699.74 ; P22.2@-2117.48,636.38 -1608.62,636.38 -1588.62,656.38 P26.1@-917.48,656.38 ; P26.1@-917.48,656.38 -862.95,641.89 ; P26.1@-917.48,656.38 -917.48,587.17 R44.2@-830.32,500 R44.2@-830.32,485.35 ; -859.78,526.03 pad.1@-832.5,497.5 ; -858.37,457.3 R44.2@-819.38,489.03 ; -857.43,524.89 pad.1@-832.5,497.5 ; -857.15,528.82 pad.1@-832.5,497.5 ; -856.69,526.38 pad.1@-832.5,497.5 ; -856.13,526.03 pad.1@-832.5,497.5 ; -855.66,466.15 pad.1@-832.5,497.5 ; -853.5,462.17 pad.1@-832.5,497.5 ; -853.36,468.03 pad.1@-832.5,497.5 ; -852.14,462.37 pad.1@-832.5,497.5 ; -852.14,462.37 -840.13,500.79 -850.72,465.55 ; -851.26,467.87 pad.1@-832.5,497.5 ; -850.72,465.55 pad.1@-832.5,497.5 ; pad.1@-832.5,497.5 R44.2@-830.32,485.35 ; pad.1@-832.5,497.5 R44.2@-819.38,489.03 ; pad.1@-832.5,497.5 R44.2@-830.32,485.35 ; R44.2@-830.32,485.35 -839.71,493.36 R44.2@-830.32,485.35 ; R44.2@-830.32,485.35 -824.3,496.13 R44.2@-830.32,485.35 ; -400,330.6 pad.1@-402.5,297.5 -400,300 P19.4@-400,480 -280,480 ; -280,480 P21.1@-240,520 -170,450 pad.1@-45,450 -77.81,450 ; -145,180 -105,220 -105,290 40,435 40,473.39 ; 40,473.39 pad.1@57.5,487.5 ; 40,473.39 Q4.2@51.18,492.89 ; 40,473.39 Q4.2@61.43,480.18 ; 40,473.39 pad.1@57.5,487.5 ; 40,473.39 Q4.2@51.18,492.89 ; 40,473.39 Q4.2@61.43,480.18 ; 40,473.39 pad.1@57.5,487.5 ; 40,473.39 Q4.2@51.18,492.89 ; 40,473.39 Q4.2@61.43,480.18 ; 40,473.39 pad.1@57.5,487.5 ; 40,473.39 Q4.2@51.18,492.89 ; 40,473.39 Q4.2@61.43,480.18 ; 40,473.39 pad.1@57.5,487.5 ; 40,473.39 Q4.2@51.18,492.89 ; 40,473.39 Q4.2@61.43,480.18 ; 40,473.39 pad.1@57.5,487.5 ; 40,473.39 Q4.2@51.18,492.89 ; 40,473.39 Q4.2@61.43,480.18 ; 40,473.39 pad.1@57.5,487.5 ; 40,473.39 Q4.2@51.18,492.89 ; 40,473.39 Q4.2@61.43,480.18 ; 40,473.39 pad.1@57.5,487.5 ; 40,473.39 Q4.2@51.18,492.89 ; 40,473.39 Q4.2@61.43,480.18 ; 40,473.39 pad.1@57.5,487.5 ; 40,473.39 Q4.2@51.18,492.89 ; 40,473.39 Q4.2@61.43,480.18 ; 40,473.39 pad.1@57.5,487.5 ; 40,473.39 Q4.2@51.18,492.89 ; 40,473.39 Q4.2@61.43,480.18 ; 40,473.39 pad.1@57.5,487.5 ; 40,473.39 Q4.2@51.18,492.89 ; 40,473.39 Q4.2@61.43,480.18 ; 40,473.39 pad.1@57.5,487.5 ; 40,473.39 Q4.2@51.18,492.89 ; 40,473.39 Q4.2@61.43,480.18 ; 40,473.39 pad.1@57.5,487.5 ; 40,473.39 Q4.2@51.18,492.89 ; 40,473.39 Q4.2@61.43,480.18 ; 40,473.39 pad.1@57.5,487.5 ; 40,473.39 Q4.2@51.18,492.89 ; 40,473.39 Q4.2@61.43,480.18 ; 40,473.39 pad.1@57.5,487.5 ; 40,473.39 Q4.2@51.18,492.89 ; 40,473.39 Q4.2@61.43,480.18 ; 40,473.39 pad.1@57.5,487.5 ; 40,473.39 Q4.2@51.18,492.89 ; 40,473.39 Q4.2@61.43,480.18 ; 40,473.39 pad.1@57.5,487.5 ; 40,473.39 Q4.2@51.18,492.89 ; 40,473.39 Q4.2@61.43,480.18 ; 40,473.39 pad.1@57.5,487.5 ; 40,473.39 Q4.2@51.18,492.89 ; 40,473.39 Q4.2@61.43,480.18 ; 40,473.39 pad.1@57.5,487.5 ; 40,473.39 Q4.2@51.18,492.89 ; 40,473.39 Q4.2@61.43,480.18 ; 40,473.39 pad.1@57.5,487.5 ; 40,473.39 Q4.2@51.18,492.89 ; 40,473.39 Q4.2@61.43,480.18 ; 40,473.39 pad.1@57.5,487.5 ; 40,473.39 Q4.2@51.18,492.89 ; 40,473.39 Q4.2@61.43,480.18 ; 40,473.39 pad.1@57.5,487.5 ; 40,473.39 Q4.2@51.18,492.89 ; 40,473.39 Q4.2@61.43,480.18 ; 40,473.39 pad.1@57.5,487.5 ; 40,473.39 Q4.2@51.18,492.89 ; 40,473.39 Q4.2@61.43,480.18 ; 40,473.39 pad.1@57.5,487.5 ; 40,473.39 Q4.2@51.18,492.89 ; 40,473.39 Q4.2@61.43,480.18 ; 40,473.39 pad.1@57.5,487.5 ; 40,473.39 Q4.2@51.18,492.89 ; 40,473.39 Q4.2@61.43,480.18 ; 40,473.39 pad.1@57.5,487.5 ; 40,473.39 Q4.2@51.18,492.89 ; 40,473.39 Q4.2@61.43,480.18 ; 40,473.39 pad.1@57.5,487.5 ; 40,473.39 Q4.2@51.18,492.89 ; 40,473.39 Q4.2@61.43,480.18 ; 40,473.39 pad.1@57.5,487.5 ; 40,473.39 Q4.2@51.18,492.89 ; 40,473.39 Q4.2@61.43,480.18 ; 40,473.39 pad.1@57.5,487.5 ; 40,473.39 Q4.2@51.18,492.89 ; 40,473.39 Q4.2@61.43,480.18 ; 40,473.39 pad.1@57.5,487.5 ; 40,473.39 Q4.2@51.18,492.89 ; 40,473.39 Q4.2@61.43,480.18 ; 40,473.39 pad.1@57.5,487.5 ; 40,473.39 Q4.2@51.18,492.89 ; 40,473.39 Q4.2@61.43,480.18 ; 40,473.39 pad.1@57.5,487.5 ; 40,473.39 Q4.2@51.18,492.89 ; 40,473.39 Q4.2@61.43,480.18 ; 40,473.39 pad.1@57.5,487.5 ; 40,473.39 Q4.2@51.18,492.89 ; 40,473.39 Q4.2@61.43,480.18 ; 40,473.39 pad.1@57.5,487.5 ; 40,473.39 Q4.2@51.18,492.89 ; 40,473.39 Q4.2@61.43,480.18 ; 40,473.39 pad.1@57.5,487.5 ; 40,473.39 Q4.2@51.18,492.89 ; 40,473.39 Q4.2@61.43,480.18 ; 40,473.39 pad.1@57.5,487.5 ; 40,473.39 Q4.2@51.18,492.89 ; 40,473.39 Q4.2@61.43,480.18 ; 40,473.39 pad.1@57.5,487.5 ; 40,473.39 Q4.2@51.18,492.89 ; 40,473.39 Q4.2@61.43,480.18 ; 40,473.39 pad.1@57.5,487.5 ; 40,473.39 Q4.2@51.18,492.89 ; 40,473.39 Q4.2@61.43,480.18 ; 40,473.39 pad.1@57.5,487.5 ; 40,473.39 Q4.2@51.18,492.89 ; 40,473.39 Q4.2@61.43,480.18 ; 40,473.39 pad.1@57.5,487.5 ; 40,473.39 Q4.2@51.18,492.89 ; 40,473.39 Q4.2@61.43,480.18 ; 40,473.39 pad.1@57.5,487.5 ; 40,473.39 Q4.2@51.18,492.89 ; 40,473.39 Q4.2@61.43,480.18 ; 40,473.39 pad.1@57.5,487.5 ; 40,473.39 Q4.2@51.18,492.89 ; 40,473.39 Q4.2@61.43,480.18 ; 40,473.39 pad.1@57.5,487.5 ; 40,473.39 Q4.2@51.18,492.89 ; 40,473.39 Q4.2@61.43,480.18 ; 40,473.39 Q4.2@57.4,479.96 ; 40,473.39 Q4.2@51.25,488.2 ; 40,473.39 Q4.2@58.24,469.72 ; 40,473.39 Q4.2@57.4,479.96 ; 40,473.39 Q4.2@51.25,488.2 ; 40,473.39 Q4.2@58.24,469.72 ; 40,473.39 Q4.2@57.4,479.96 ; 40,473.39 Q4.2@51.25,488.2 ; 40,473.39 Q4.2@58.24,469.72 ; 40,473.39 Q4.2@57.4,479.96 ; 40,473.39 Q4.2@51.25,488.2 ; 40,473.39 Q4.2@58.24,469.72 ; 40,473.39 Q4.2@57.4,479.96 ; 40,473.39 Q4.2@51.25,488.2 ; 40,473.39 Q4.2@58.24,469.72 ; 40,473.39 Q4.2@57.4,479.96 ; 40,473.39 Q4.2@51.25,488.2 ; 40,473.39 Q4.2@58.24,469.72 ; 40,473.39 Q4.2@57.4,479.96 ; 40,473.39 Q4.2@51.25,488.2 ; 40,473.39 Q4.2@58.24,469.72 ; 40,473.39 Q4.2@57.4,479.96 ; 40,473.39 Q4.2@51.25,488.2 ; 40,473.39 Q4.2@58.24,469.72 ; 40,473.39 Q4.2@57.4,479.96 ; 40,473.39 Q4.2@51.25,488.2 ; 40,473.39 Q4.2@58.24,469.72 ; 40,473.39 Q4.2@57.4,479.96 ; 40,473.39 Q4.2@51.25,488.2 ; 40,473.39 Q4.2@58.24,469.72 ; 40,473.39 Q4.2@57.4,479.96 ; 40,473.39 Q4.2@51.25,488.2 ; 40,473.39 Q4.2@58.24,469.72 ; 40,473.39 Q4.2@57.4,479.96 ; 40,473.39 Q4.2@51.25,488.2 ; 40,473.39 Q4.2@58.24,469.72 ; 40,473.39 Q4.2@57.4,479.96 ; 40,473.39 Q4.2@51.25,488.2 ; 40,473.39 Q4.2@58.24,469.72 ; 40,473.39 Q4.2@57.4,479.96 ; 40,473.39 Q4.2@51.25,488.2 ; 40,473.39 Q4.2@58.24,469.72 ; 40,473.39 Q4.2@57.4,479.96 ; 40,473.39 Q4.2@51.25,488.2 ; 40,473.39 Q4.2@58.24,469.72 ; 40,473.39 Q4.2@57.4,479.96 ; 40,473.39 Q4.2@51.25,488.2 ; 40,473.39 Q4.2@58.24,469.72 ; 40,473.39 Q4.2@57.4,479.96 ; 40,473.39 Q4.2@51.25,488.2 ; 40,473.39 Q4.2@58.24,469.72 ; 40,473.39 Q4.2@57.4,479.96 ; 40,473.39 Q4.2@51.25,488.2 ; 40,473.39 Q4.2@58.24,469.72 ; 40,473.39 Q4.2@57.4,479.96 ; 40,473.39 Q4.2@51.25,488.2 ; 40,473.39 Q4.2@58.24,469.72 ; 40,473.39 Q4.2@57.4,479.96 ; 40,473.39 Q4.2@51.25,488.2 ; 40,473.39 Q4.2@58.24,469.72 ; 40,473.39 Q4.2@57.4,479.96 ; 40,473.39 Q4.2@51.25,488.2 ; 40,473.39 Q4.2@58.24,469.72 ; 41.38,474.76 cw(c50.2,465.94) Q4.2@55.9,477.04 ; 41.38,474.76 cw(c50.2,465.94) Q4.2@55.9,477.04 ; 41.38,474.76 cw(c50.2,465.94) Q4.2@55.9,477.04 ; 45,1220 47.32,1259.97 45.91,1316.48
  Top Layer w10: C57.2@-2079.64,1009.52 -2036.17,976.17 ; C57.2@-2074.29,1022 C57.2@-2070,1010 ; C57.2@-2073.15,1013.15 ccw(c-2065.67,1020.62) C57.2@-2058.31,1013.04 ; C57.2@-2072.92,1018.37 -2043.12,984.89 ; C57.2@-2072.96,1018.42 -2039.91,979.91 ; C57.2@-2072.7,1018.11 -2040.12,984.79 ; C57.2@-2070.69,1022.5 ccw(c-2042.17,1022.5) C57.2@-2062.34,1002.34 ; C57.2@-2070.32,1005.71 cw(c-2070.32,994.59) C57.2@-2062.45,1002.45 ; C57.2@-2070.32,1019.02 -2036.17,976.17 ; C57.2@-2067.01,1019.02 ccw(c-2038.02,1019.02) -2058.52,998.52 ; C57.2@-2061.71,1026.09 -2040.12,984.79 ; C57.2@-2061.52,1025.76 -2043.12,984.89 ; C57.2@-2061.55,1025.81 -2039.91,979.91 ; C57.2@-2061.42,1019.43 C57.2@-2070,1010 ; C57.2@-2060.69,1022.5 ccw(c-2008.03,1022.5) -2045.27,985.27 ; C57.2@-2058.98,1025.98 -2036.17,976.17 ; C57.2@-2057.01,1019.02 ccw(c-2003.88,1019.02) -2041.45,981.45 ; R33.2@-1862.28,1014.72 -1840,970 ; R33.2@-1858.34,1008.91 cw(c-1892.47,969.06) -1840,969.06 ; R33.2@-1851.84,1016.5 cw(c-1873.86,990.78) -1840,990.78 ; R33.2@-1849.68,1019.02 -1840,970 ; R33.2@-1849.68,1020 -1840,1010.32 -1840,970 ; R33.2@-1836.4,1019.83 -1840,970 ; -1618.82,926.18 ccw(c-1674.77,982.13) C53.2@-1595.86,987.97 ; -1603.38,941.62 ccw(c-1646.03,984.26) C53.2@-1585.88,988.71 ; C53.2@-1594.3,996.68 -1614.73,930.27 ; -1587.95,957.05 ccw(c-1617.29,986.39) C53.2@-1575.91,989.45 ; C53.2@-1584.95,993.04 -1614.73,930.27 ; C53.2@-1578.07,989.29 -1614.73,930.27 ; C53.2@-1575,1005 -1575,970 -1630,915 -1785,915 -1840,970 ; C53.2@-1571.66,984.79 -1614.73,930.27 ; C53.2@-1564.25,978.01 -1614.73,930.27 ; C57.2@-2070,1010 pad.1@-2067.5,1022.5 ; C57.2@-2070,1010 -2030,970 -1840,970 ; pad.1@-2067.5,1022.5 -2040.12,984.79 ; pad.1@-2067.5,1022.5 -2039.91,979.91 ; pad.1@-2067.5,1022.5 -2043.12,984.89
  Top Layer w20: D8.1@-1881.3,354.84 C63.2@-1783.4,350 ; D8.1@-1874.06,312.73 C63.2@-1783.4,350 ; D8.1@-1864.8,331.97 cw(c-1821.26,288.43) -1821.26,350 ; D8.1@-1864.8,362.37 ccw(c-1834.95,392.22) -1834.95,350 ; -1837.88,348.98 pad.1@-1760,350 ; -1837.76,351.68 pad.1@-1760,350 ; -1837.71,338.17 pad.1@-1760,350 ; -1835.81,351.03 pad.1@-1760,350 ; -1835.72,342.15 pad.1@-1760,350 ; -1835.7,353.76 pad.1@-1760,350 ; -1834.01,329.75 pad.1@-1760,350 ; -1831.96,349.73 pad.1@-1760,350 ; -1831.93,352.29 pad.1@-1760,350 ; -1831.42,340.55 pad.1@-1760,350 ; -1830.61,324.75 pad.1@-1760,350 ; -1829.14,328.3 pad.1@-1760,350 ; -1796.35,350 cw(c-1796.35,312.43) C63.2@-1769.78,339 ; -1787.04,350 ccw(c-1787.04,374.4) C63.2@-1769.78,357.15 ; C63.2@-1765.09,360.14 D8.1@-1852.83,321.46 ; C63.2@-1762.98,360.7 D8.1@-1849.6,338.61 ; C63.2@-1761.4,360.89 -1843.55,350 ; C63.2@-1760.94,360.9 -1843.81,352.99 ; C63.2@-1699.29,360.91 ccw(c-1699.29,409.67) -1664.81,375.19 ; C63.2@-1690.1,339.11 -1630,410 ; C63.2@-1685,355 -1630,410 ; -1658.2,391.07 pad.1@-1720,350 ; -1650.34,391.82 pad.1@-1720,350 ; U18.2@-1593.98,450 -1620,450 ; U18.2@-1585.12,450 -1620,450 ; D8.1@-1852.83,321.46 C63.2@-1760.71,348.07 ; D8.1@-1852.83,321.46 -1757.98,335.53 pad.1@-1760,350 ; D8.1@-1849.6,338.61 C63.2@-1760.71,348.07 ; D8.1@-1849.6,338.61 -1760.27,335.24 pad.1@-1760,350 ; -1843.81,352.99 C63.2@-1760.71,348.07 ; -1843.81,352.99 -1762.45,335.36 pad.1@-1760,350 ; -1843.55,350 C63.2@-1760.71,348.07 ; -1843.55,350 -1762,335.3 pad.1@-1760,350 ; C63.2@-1783.4,350 D8.1@-1880,333.39 -1863.39,350 pad.1@-1720,350 ; pad.1@-1720,350 -1707.16,358.21 -1630,410 ; pad.1@-1720,350 -1699.29,348.07 -1630,410 ; -1630,410 -1630,440 -1620,450